# Altium PCB pcb1.PcbDoc
Units mm, origin at the board's own origin, x right, y up, seen from the top; angles counter-clockwise.
Board outline 162.18 x 86.23 mm, 2 copper layers (Top Layer, Bottom Layer); 36 components, 30 nets, 147 pads, 19 vias.
Unrouted connection lines stored in the file: 1.
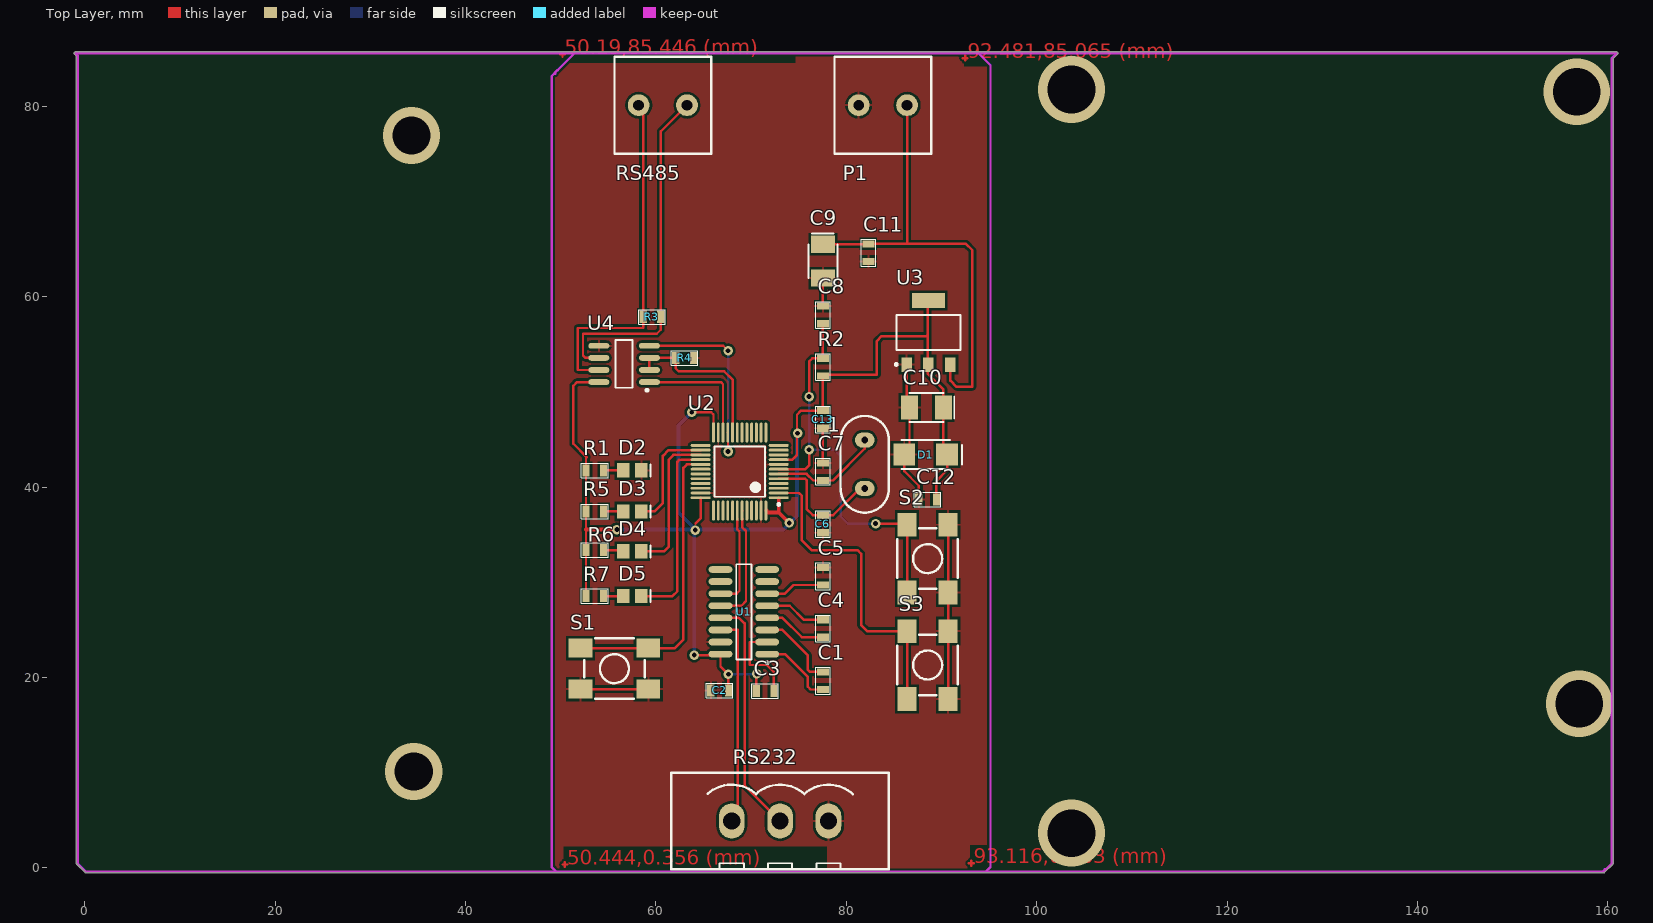
[diagram p0: Top Layer view]
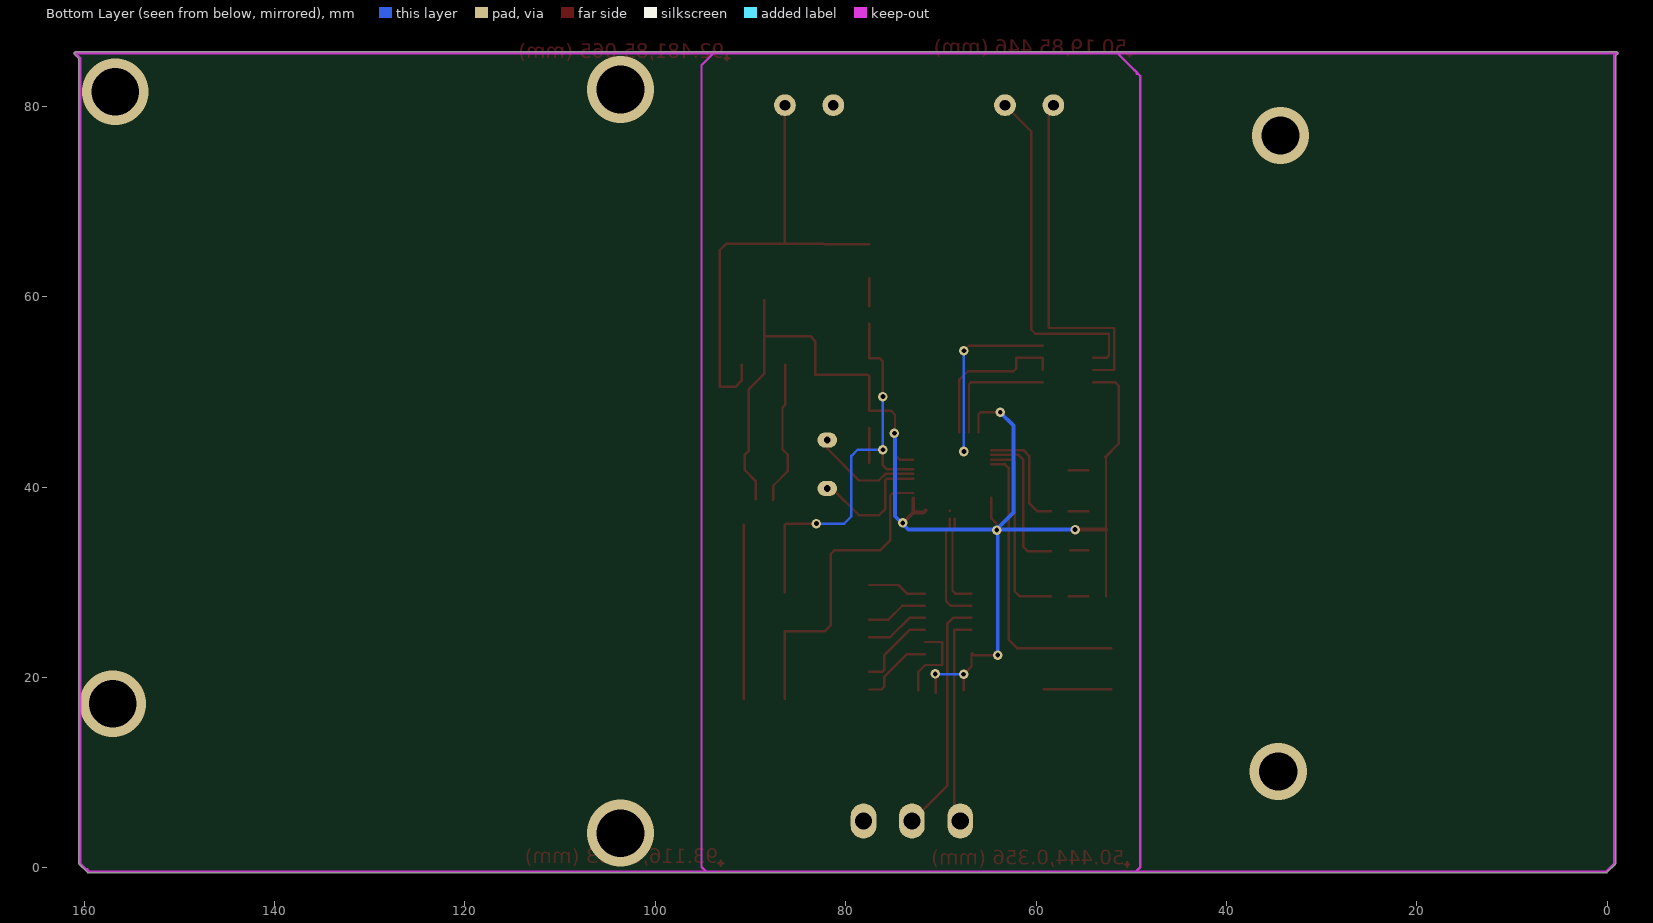
[diagram p1: Bottom Layer view, seen from below]

## Layer stack, top to bottom
Top Solder: solder mask 0.0102, Solder Resist, Dk 3.5
Top Layer: signal copper 0.0356
Dielectric 1: dielectric 0.32, FR-4, Dk 4.8
Bottom Layer: signal copper 0.0356
Bottom Solder: solder mask 0.0102, Solder Resist, Dk 3.5

## Board outline
0.062,-0.496 -0.827,0.393 -0.826,0.392 cw(c-0.737,0.483) -0.864,0.483 -0.864,85.266 -1.081,85.483 -1.08,85.482 cw(c-0.991,85.573) -0.991,85.7 160.934,85.7 cw(c160.934,85.573) 161.062,85.573 cw(c160.934,85.573) 161.024,85.482 161.024,85.483 160.554,85.012 160.554,0.483 cw(c160.426,0.483) 160.516,0.392 160.516,0.393 159.627,-0.496 cw(c159.537,-0.406) 159.474,-0.517 cw(c159.41,-0.406) 159.41,-0.534 0.152,-0.534 cw(c0.152,-0.406)

## Design rules (kind name [scope] priority, off if disabled: settings)
Clearance [All] p1: gap=0.254
PolygonConnect [All] p1: connectstyle=Relief reliefconductorwidth=0.254 reliefentries=4 polygonreliefangle="90 Angle" airgapwidth=0.254
RoutingVias [All] p1: holewidth=0.5 width=1.27 viastyle="Through Hole" minholewidth=0 minwidth=1.27 maxholewidth=0.8 maxwidth=1.27
SolderMaskExpansion [All] p1: expansion=0.102
Width [All] p1: maxlimit=0.5 minlimit=0.254 preferedwidth=0.254
30 further rules are at their usual default settings.

## Components (designator, comment, footprint, x,y, rotation, side; value= is the part's Value field where it differs from the comment)
1 "XTAL" XTAL 81.94,42.393 r270 top
C1 "Cap" 0805 77.545,19.66 r90 top
C2 "Cap" 0805 66.7,18.644 r180 top
C3 "Cap" 0805 71.476,18.593 r180 top
C4 "Cap" 0805 77.545,25.149 r270 top
C5 "Cap" 0805 77.545,30.638 r90 top
C6 "20PF" 0805 77.545,36.127 r270 top
C7 "20PF" 0805 77.545,41.616 r90 top
C8 "Cap" 0805 77.545,58.084 r90 top
C9 "Cap Pol1" CAP-3528 77.545,63.729 r270 top
C10 "Cap Pol1" CAP-3528 88.424,48.362 r180 top
C11 "Cap" 0805 82.321,64.618 r90 top
C12 "Cap" 0805 88.544,38.71 r0 top
C13 "Cap" 0805 77.545,47.106 r90 top
D1 "D-Schottky" DIODE-SMA 88.34,43.409 r0 top
D2 "LED0" LED_0805 57.52,41.758 r0 top
D3 "LED0" LED_0805 57.52,37.44 r0 top
D4 "LED0" LED_0805 57.52,33.249 r0 top
D5 "LED0" LED_0805 57.52,28.55 r0 top
P1 "Header 2" HDR2X1_D1 83.845,80.112 r180 top
R1 "510" 0805 53.583,41.758 r180 top
R2 "10K" 0805 77.545,52.595 r270 top
R3 "Res2" 0805 59.588,57.887 r0 top
R4 "10K" 0805 63.017,53.569 r180 top
R5 "510" 0805 53.583,37.44 r180 top
R6 "510" 0805 53.583,33.376 r180 top
R7 "510" 0805 53.583,28.55 r180 top
RS232 "D Connector 9" HDR3X1_D1 73.05,4.928 r0 top
RS485 "D Connector 9" HDR2X1_D1 60.731,80.112 r0 top
S1 "SW-PB4" SW_PB4_A1 55.651,20.93 r180 top
S2 "SW-PB4" SW_PB4_A1 88.544,32.487 r90 top
S3 "SW-PB4" SW_PB4_A1 88.544,21.311 r270 top
U1 "MAX232" NSO16_M 69.24,26.899 r180 top
U2 "STM32F103C" LQFP-48_M 68.806,41.631 r180 top
U3 "ASM1117" SOT-223 88.632,56.236 r0 top
U4 "SP3485" NSO8_N 56.667,52.934 r180 top

## Footprints (in the part's own frame and the unit in brackets; to place one, negate y for a bottom-side part, rotate by r counter-clockwise, add the part's x,y. Pads: shape width x height; smd on the part's side, far side on the other; paste and mask are expansions set on the pad)
0805 [mm]
  rect 0.762x1.27 smd: 1(-0.925,0) 2(0.925,0)
  silkscreen extent -1.4,-0.76 1.4,0.76
CAP-3528 [mm] "钽"
  rect 1.8x2.5 smd: 1(-1.778,0) 2(1.778,0)
  silkscreen extent -2.92,-1.52 1.78,1.52, body extent -1.91,-1.4 1.91,1.4, height 1.1
DIODE-SMA [mm] "贴片二极管"
  rect 2.3x2.3 smd: 1(-2.25,0) 2(2.25,0)
  silkscreen extent -2.54,-1.52 3.81,1.52, body extent -2.92,-1.4 2.92,1.4, height 3
HDR2X1_D1 [mil] "5.08mm端"
  round 90 hole 45: 1(-100,0) 2(100,0)
  silkscreen extent -200,-200 200,200
HDR3X1_D1 [mm] "5.08mm端"
  oval 2.7x3.7 hole 1.8: 1(-5.08,0) 2(0,0) 3(5.08,0)
  silkscreen extent -11.43,-5.08 11.43,5.08
LED_0805 [mm] "贴片二极管"
  rect 1.3x1.5 smd: 1(-0.95,0) 2(0.95,0)
  silkscreen extent 1.91,-0.64 1.91,0.64
LQFP-48_M [mm] "Thin QFP, 48-Leads, Body 7x7mm, Pitch 0.5mm, IPC Low Density"
  oval 2.1x0.3 smd: 1(-4.1,2.75) 2(-4.1,2.25) 3(-4.1,1.75) 4(-4.1,1.25) 5(-4.1,0.75) 6(-4.1,0.25) 7(-4.1,-0.25) 8(-4.1,-0.75) 9(-4.1,-1.25) 10(-4.1,-1.75) 11(-4.1,-2.25) 12(-4.1,-2.75) 25(4.1,-2.75) 26(4.1,-2.25) 27(4.1,-1.75) 28(4.1,-1.25) 29(4.1,-0.75) 30(4.1,-0.25) 31(4.1,0.25) 32(4.1,0.75) 33(4.1,1.25) 34(4.1,1.75) 35(4.1,2.25) 36(4.1,2.75)
  oval 0.3x2.1 smd: 13(-2.75,-4.1) 14(-2.25,-4.1) 15(-1.75,-4.1) 16(-1.25,-4.1) 17(-0.75,-4.1) 18(-0.25,-4.1) 19(0.25,-4.1) 20(0.75,-4.1) 21(1.25,-4.1) 22(1.75,-4.1) 23(2.25,-4.1) 24(2.75,-4.1) 37(2.75,4.1) 38(2.25,4.1) 39(1.75,4.1) 40(1.25,4.1) 41(0.75,4.1) 42(0.25,4.1) 43(-0.25,4.1) 44(-0.75,4.1) 45(-1.25,4.1) 46(-1.75,4.1) 47(-2.25,4.1) 48(-2.75,4.1)
  silkscreen extent -4.23,-2.65 2.65,3.57, body extent -3.5,-3.5 3.5,3.5, height 1.6
NSO8_N [mm] "SOIC-max660"
  oval 2.2x0.6 smd: 1(-2.654,1.905) 2(-2.654,0.635) 3(-2.654,-0.635) 4(-2.654,-1.905) 5(2.654,-1.905) 6(2.654,-0.635) 7(2.654,0.635) 8(2.654,1.905)
  silkscreen extent -2.53,-2.5 0.9,2.88, body extent -1.95,-2.45 1.95,2.45, height 1.75
NSO16_M [mm] "SOIC, 16-Leads, Body 9.9x3.9mm, Pitch 1.27mm, IPC Low Density"
  oval 2.5x0.7 smd: 1(-2.45,4.445) 2(-2.45,3.175) 3(-2.45,1.905) 4(-2.45,0.635) 5(-2.45,-0.635) 6(-2.45,-1.905) 7(-2.45,-3.175) 8(-2.45,-4.445) 9(2.45,-4.445) 10(2.45,-3.175) 11(2.45,-1.905) 12(2.45,-0.635) 13(2.45,0.635) 14(2.45,1.905) 15(2.45,3.175) 16(2.45,4.445)
  silkscreen extent -2.58,-5 0.8,5.47, body extent -2,-5 2,5, height 1.75
SOT-223 [mm]
  rect 1.1x1.55 smd: 1(-2.3,-3.375) 2(0,-3.375) 3(2.3,-3.375)
  rect 3.45x1.55 smd: 4(0,3.375)
  silkscreen extent -3.5,-3.48 3.35,1.85, body extent -3.3,-3.94 3.3,3.43, height 0.8
SW_PB4_A1 [mm]
  rect 2.5x2 smd: 1(-3.556,2.159) 2(-3.556,-2.159) 3(3.556,-2.159) 4(3.556,2.159)
  silkscreen extent -3.17,-3.18 3.17,3.18, body extent -3.18,-3.18 3.18,3.18, height 6
XTAL [mil]
  oval 62x82 hole 28: 1(-100,0) 2(100,0)
  silkscreen extent -200,-100 200,100

## Part data
1: "Crystal Oscillator"
C1 C2 C3 C4 C5 C8 C11 C12 C13: "Capacitor"
C6 C7: library part Cap, "Capacitor"
C9 C10: "Polarized Capacitor (Radial)"
D1: "肖特基二极管"
D2 D3 D4 D5: "发光二极管"
P1: "接插件"
R1 R2 R4 R5 R6 R7: library part Res2, "Resistor"
R3: "Resistor"
RS232 RS485: "串口"
S1 S2 S3: "微动开关"
U1: "+5V Powered, Multi-Channel RS-232 Driver/Receiver"
U2: "STM32单片机48引脚"
U3: "3.3V稳压芯片"
U4: "485总线芯片"

## Via types
v1: diameter 1, hole 0.5, Top Layer to Bottom Layer, 13 vias
v2: diameter 7, hole 5, Top Layer to Bottom Layer, 4 vias
v3: diameter 6, hole 4, Top Layer to Bottom Layer, 2 vias

## Nets (pads, with @x,y where several pads share a name; then routed paths per layer and width w, separated by ;. In a path a pad name is that pad's centre, name@x,y a point inside that pad or via, vN(x,y) a via of type N, cw(c..) or ccw(c..) an arc to the next point about the centre after c; other vN are vias at no path point)
3V3: C2.1 C3.2 C10.1 C12.2 C13.2 D1.2 R1.2 R2.2 R5.2 R6.2 R7.2 U1.16 U2.1 U2.9 U2.24 U2.36 U2.48 U3.2 U3.4 U4.8 | length 157.3
  Top Layer w0.254: R7.2 R6.2 52.658,35.535 R5.2 R1.2 52.658,43.155 52.73,43.155 51.333,44.552 51.333,50.648 51.714,51.029 U4.8 ; v1(63.779,47.854) 65.811,47.854 66.056,47.609 U2.24 ; v1(64.033,22.352) 66.536,22.352 66.714,22.53 U1.16 66.79,21.166 v1(67.625,20.331) C2.1 ; 64.16,36.17 64.706,36.716 U2.36 ; C3.2@70.551,18.415 v1@70.551,20.132 ; U2.9 74.351,42.881 74.828,43.358 74.828,47.6 75.26,48.031 C13.2 R2.2 77.665,51.791 83.21,51.791 83.21,55.347 83.718,55.855 88.417,55.855 88.544,55.982 ; U3.4@88.544,59.611 88.544,55.982 ; C12.2 89.469,40.651 90.59,41.771 D1.2 90.202,43.797 C10.1 90.202,50.26 88.544,51.918 88.544,55.982
  Top Layer w0.4: 52.658,35.535 v1(55.905,35.535) ; U2.48@71.606,37.531 71.807,37.33 72.906,37.33 ; U2.1@72.906,38.831 72.906,37.33 ; v1@74.13,36.233 v1(74.003,36.233) 72.906,37.33
  Bottom Layer w0.254: v1(67.625,20.331) v1@70.551,20.331
  Bottom Layer w0.4: v1(55.905,35.535) v1@64.16,35.535 ; v1(63.779,47.854) 62.382,46.457 62.382,37.313 v1@64.16,35.535 ; v1(64.033,22.352) 64.033,35.382 v1(64.135,35.484) ; v1@74.828,45.695 74.828,36.932 73.431,35.535 v1@64.16,35.535
  other v1: 70.587,20.371 74.879,45.644
5V: C9.1 C11.2 P1.1 U3.3 | length 49.2
  Top Layer w0.254: C9.1 82.285,65.507 C11.2 86.385,65.543 ; P1.1 86.385,65.543 ; U3.3 90.932,51.181 91.592,50.521 93.243,50.521 93.243,64.872 92.572,65.543 86.385,65.543
A: R3.2 RS485.2 U4.6 | length 37.1
  Top Layer w0.254: U4.6 52.603,53.569 52.349,53.823 52.349,56.109 60.096,56.109 60.513,56.526 R3.2 60.513,77.354 RS485.2
B: R3.1 RS485.1 U4.7 | length 37.1
  Top Layer w0.254: U4.7 51.841,52.299 51.805,52.335 51.805,56.708 58.663,56.708 R3.1 58.663,79.64 RS485.1
DIR: R4.2 U2.20 U4.2 U4.3 | length 17.2
  Top Layer w0.254: U4.2 U4.3 R4.2 62.092,52.462 62.382,52.172 67.167,52.172 68.056,51.283 U2.20
GND: C2.2 C5.2 C6.2 C7.2 C8.2 C9.2 C10.2 C11.1 C12.1 C13.1 D1.1 D2.2 P1.2 R4.1 RS232.3 S1.1 S1.4 S2.2 S2.3 S3.1 S3.4 U1.15 U2.8 U2.23 U2.35 U2.47 U3.1 U4.5 | length 47.2
  Top Layer w0.254: S1.4 S1.1 ; C7.2 C13.1 ; C8.2 C9.2 ; U3.1 86.332,48.675 C10.2 86.646,43.964 D1.1 86.09,41.672 87.619,40.143 C12.1 C12.1@87.655,38.674 ; S3.4 S3.1 S2.2 S2.3
KEY1: S1.2 S1.3 U2.29 | length 31.2
  Top Layer w0.254: S1.3 S1.2 62.001,23.089 62.89,23.978 62.89,42.012 63.259,42.381 U2.29
KEY2: S3.2 S3.3 U2.2 | length 33.7
  Top Layer w0.254: U2.2 75.046,39.381 75.336,39.091 75.336,34.392 76.352,33.376 81.178,33.376 81.559,32.995 81.559,25.502 82.194,24.867 S3.2 S3.3
LED0: D3.2 U2.26 | length 11.8
  Top Layer w0.254: D3.2 59.842,37.44 60.731,38.329 60.731,43.282 61.33,43.881 U2.26
LED1: D4.2 U2.27 | length 15.8
  Top Layer w0.254: D4.2 60.858,33.249 61.366,33.757 61.366,42.901 61.846,43.381 U2.27
LED2: D5.2 U2.28 | length 20.1
  Top Layer w0.254: D5.2 61.747,28.55 62.255,29.058 62.255,42.647 62.489,42.881 U2.28
Net1_1: 1.1 C7.1 U2.6 | length 11.6
  Top Layer w0.254: U2.6 75.84,41.381 76.53,40.691 C7.1 78.588,40.691 81.94,44.044 1.1
Net1_2: 1.2 C6.1 U2.5 | length 13.6
  Top Layer w0.254: U2.5 75.698,40.881 75.841,40.738 75.841,37.697 76.486,37.052 C6.1 78.632,37.052 81.432,39.853 1.2
NetC1_1: C1.1 U1.1 | length 8
  Top Layer w0.254: U1.1 73.558,22.454 75.971,20.041 75.971,19.025 76.261,18.735 C1.1
NetC1_2: C1.2 U1.3 | length 8.6
  Top Layer w0.254: U1.3 73.304,24.994 75.971,22.327 75.971,20.803 76.189,20.585 C1.2
NetC3_1: C3.1 U1.2 | length 9
  Top Layer w0.254: U1.2 69.875,23.724 69.875,21.311 71.653,21.311 72.365,20.599 C3.1@72.365,18.644
NetC4_1: C4.1 U1.5 | length 6.5
  Top Layer w0.254: U1.5 74.066,27.534 75.526,26.074 C4.1
NetC4_2: C4.2 U1.4 | length 6.7
  Top Layer w0.254: U1.4 73.304,26.264 75.344,24.224 C4.2
NetC5_1: C5.1 U1.6 | length 6.2
  Top Layer w0.254: U1.6 73.558,28.804 74.468,29.713 C5.1
NetD2_1: D2.1 R1.1 | length 2.1
  Top Layer w0.254: R1.1 D2.1
NetD3_1: D3.1 R5.1 | length 2.1
  Top Layer w0.254: R5.1 D3.1
NetD4_1: D4.1 R6.1 | length 1.9
  Top Layer w0.254: R6.1 D4.1@56.443,33.376
NetD5_1: D5.1 R7.1 | length 2.1
  Top Layer w0.254: R7.1 D5.1
RESET: C8.1 R2.1 S2.1 S2.4 U2.7 | length 43.7
  Top Layer w0.254: U2.7 75.713,41.881 76.098,42.266 v1(76.098,43.917) ; v1(76.098,49.505) 76.098,53.188 76.431,53.52 R2.1 C8.1 ; v1(83.083,36.17) S2.4@86.258,36.17 ; S2.1 S2.4
  Bottom Layer w0.254: v1(76.098,49.505) v1(76.098,43.917) 78.765,43.917 79.4,43.282 79.4,36.932 80.162,36.17 v1(83.083,36.17)
RS485_RX: U2.22 U4.1 | length 12.9
  Top Layer w0.254: U4.1 66.827,51.029 67.056,50.8 U2.22
RS485_TX: U2.21 U4.4 | length 21.1
  Top Layer w0.254: U4.4 67.081,54.839 v1(67.589,54.331) ; U2.21 67.579,45.708 v1(67.579,43.738) v1@67.589,43.728
  Bottom Layer w0.254: v1@67.589,43.728 v1(67.589,54.331)
RX1: RS232.1 U1.14 | length 22.1
  Top Layer w0.254: U1.14 68.605,24.994 68.605,5.563 RS232.1
TX1: RS232.2 U1.13 | length 25.1
  Top Layer w0.254: U1.13 68.732,26.264 69.317,25.679 69.317,8.661 RS232.2
USART_RX: U1.12 U2.43 | length 11.7
  Top Layer w0.254: U1.12 68.986,27.534 69.469,28.016 69.469,35.382 69.064,35.787 U2.43@69.064,36.703 ; U2.43 U2.43@69.059,37.528
USART_TX: U1.11 U2.42 | length 9.8
  Top Layer w0.254: U1.11 68.478,28.804 68.783,29.108 68.783,35.35 68.556,35.576 U2.42@68.556,36.678
pads on no net: U1.7 U1.8 U1.9 U1.10 U2.3 U2.4 U2.10 U2.11 U2.12 U2.13 U2.14 U2.15 U2.16 U2.17 U2.18 U2.19 U2.25 U2.30 U2.31 U2.32 U2.33 U2.34 U2.37 U2.38 U2.39 U2.40 U2.41 U2.44 U2.45 U2.46
copper on no net: | length 4.1
  Top Layer w0.254: 49.936,85.446 50.444,85.446 ; 50.19,0.356 50.698,0.356 ; 50.19,85.192 50.19,85.7 ; 50.444,0.102 50.444,0.61 ; 92.227,85.065 92.735,85.065 ; 92.481,84.811 92.481,85.319 ; 92.862,0.483 93.37,0.483 ; 93.116,0.229 93.116,0.737
  other v2: 103.657,3.658 156.997,17.247 156.743,81.509 103.657,81.763
  other v3: 34.569,10.135 34.315,76.937

## Polygon pours and split planes (outlines as drawn)
GND on Top Layer "Top Layer-No Net" (solid, remove dead copper, pour order 6): 44.907,92.989 47.015,90.881 99.974,90.881 99.974,-2.743 96.799,-5.918 96.393,-5.512 42.139,-5.512

## Keep-outs
Keep-Out Layer:
  lines w0.254: 49.682,83.795 49.047,83.16 49.047,83.033 49.047,0.102 49.555,-0.406 94.64,-0.406 95.148,0.102 95.148,1.88 95.148,84.303 93.878,85.573 51.46,85.573 ; 50.952,-0.406 0.152,-0.406 -0.737,0.483 -0.737,85.319 -0.991,85.573 51.46,85.573 ; 93.751,85.573 160.934,85.573 160.426,85.065 160.426,0.483 159.537,-0.406 ; 94.259,-0.406 159.41,-0.406 159.664,-0.152 ; 49.428,83.541 49.428,83.414 49.428,83.541 ; 49.428,83.541 51.46,85.573

## Other copper
Top Layer:
  text "50.19,85.446 (mm)" at 50.444,85.446 h1.52
  text "92.481,85.065 (mm)" at 92.735,85.065 h1.52
  text "93.116,0.483 (mm)" at 93.37,0.483 h1.52
  text "50.444,0.356 (mm)" at 50.698,0.356 h1.52